# Altium PCB MainBoard.PcbDoc (part 2 of 2)
Units mm, origin at the board's own origin, x right, y up, seen from the top; angles counter-clockwise.
Board outline 160 x 182.5 mm, 4 copper layers (Component Side, Ground Plane, Power Plane, Solder Side), stack 0.844 mm thick; 72 components, 164 nets, 724 pads, 131 vias.
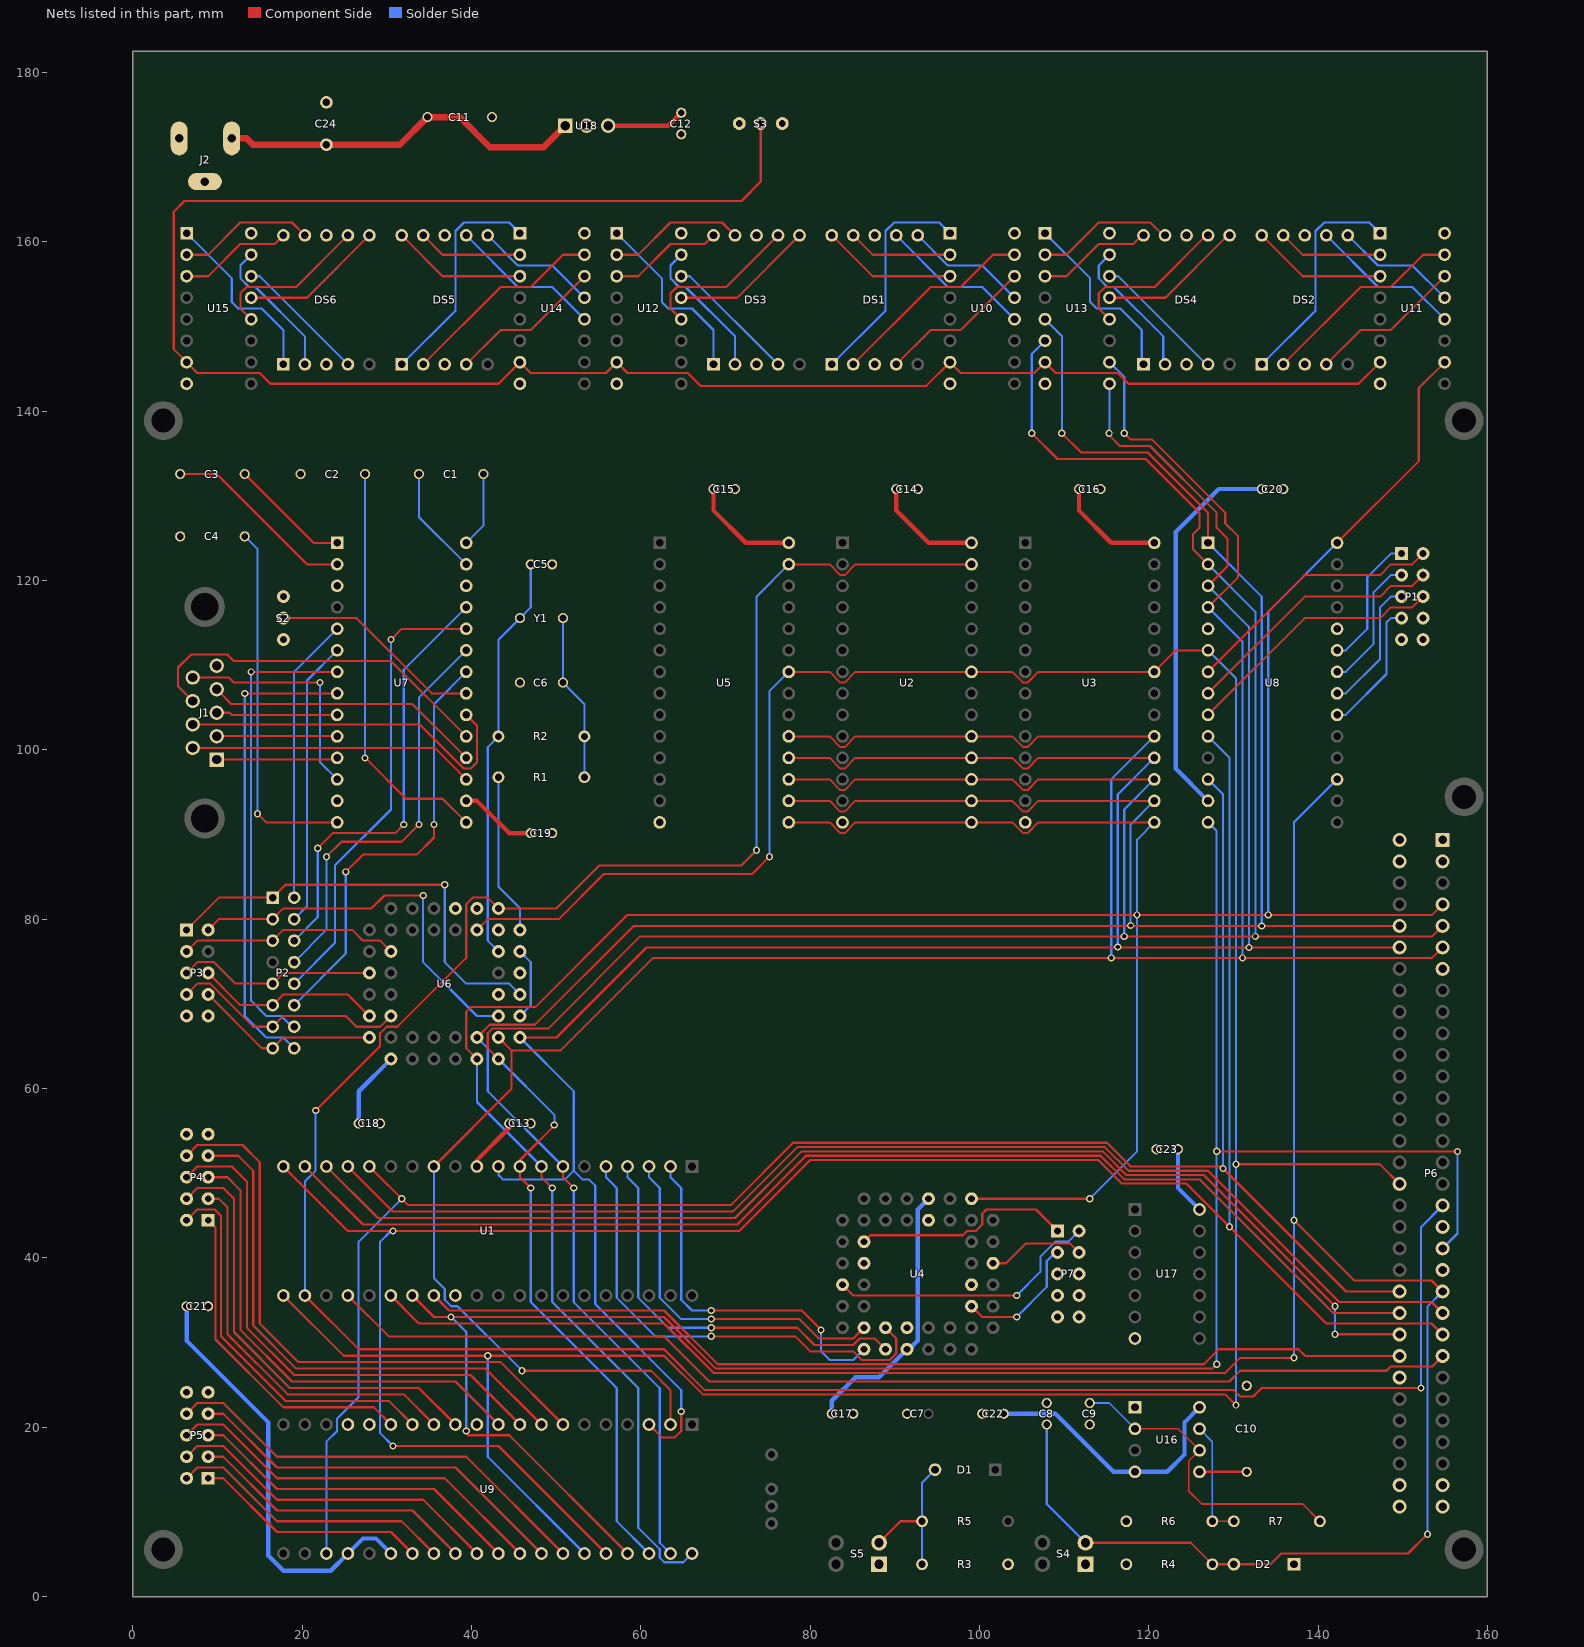
[diagram p4: the nets of this part, all layers, seen from the top]

## Via types
v1: diameter 0.85, hole 0.5, Component Side to Solder Side, 131 vias

## Nets (pads, with @x,y where several pads share a name; then routed paths per layer and width w, separated by ;. In a path a pad name is that pad's centre, name@x,y a point inside that pad or via, vN(x,y) a via of type N, cw(c..) or ccw(c..) an arc to the next point about the centre after c; other vN are vias at no path point) (continued)
D3: P6.A4 U1.8 U2.15 U3.15 U4.40 U5.15 U6.4 U8.28 U9.40 U11.10 | length 379.8
  Component Side w0.254: U6.4@40.64,63.5 39.37,64.77 39.37,69.088 39.901,69.619 47.521,69.619 58.42,80.518 v1(118.618,80.518) 153.468,80.518 P6.A4@154.7,81.75 ; U1.8@48.26,50.8 48.26,49.53 v1(49.53,48.26) ; U5.15@77.47,91.44 82.296,91.44 83.566,90.17 84.074,90.17 85.344,91.44 U2.15@99.06,91.44 103.886,91.44 105.156,90.17 105.664,90.17 106.934,91.44 U3.15@120.65,91.44 ; U4.40@99.06,46.99 v1(113.03,46.99) ; U8.28@142.24,124.46 151.892,134.112 151.892,142.748 U11.10@154.94,145.796
  Solder Side w0.254: U6.4@40.64,63.5 40.64,58.42 U1.8@48.26,50.8 ; v1(49.53,48.26) 49.53,34.798 59.69,24.638 59.69,8.128 62.23,5.588 62.23,4.572 62.749,4.053 65.013,4.053 U9.40@66.04,5.08 ; v1(113.03,46.99) 118.618,52.578 v1(118.618,80.518) 118.618,89.408 U3.15@120.65,91.44 ; v1(134.112,80.518) 134.112,116.332 U8.28@142.24,124.46
D4: P6.C5 U1.7 U2.16 U3.16 U5.16 U6.5 U8.1 U9.39 U13.5 | length 332.9
  Component Side w0.254: U6.5@40.64,66.04 42.141,67.541 47.475,67.541 59.144,79.21 P6.C5@149.62,79.21 ; U1.7@50.8,50.8 50.8,49.53 v1(52.07,48.26) ; U5.16@77.47,93.98 82.296,93.98 83.566,92.71 84.074,92.71 85.344,93.98 U2.16@99.06,93.98 103.886,93.98 105.156,92.71 105.664,92.71 106.934,93.98 U3.16@120.65,93.98 ; v1(109.728,137.414) 112.014,135.128 119.888,135.128 127,128.016 U8.1@127,124.46
  Solder Side w0.254: U6.5@40.64,66.04 41.91,64.77 41.91,59.69 U1.7@50.8,50.8 ; v1(52.07,48.26) 52.07,34.776 62.23,24.616 62.23,6.35 U9.39@63.5,5.08 ; U13.5@107.741,150.876 109.728,148.889 v1(109.728,137.414) ; v1(117.856,79.248) 117.856,91.186 U3.16@120.65,93.98 ; U8.1@127,124.46 133.35,118.11 v1@133.35,79.248
  other v1: 133.35,79.21
D5: P6.A5 U1.9 U2.17 U3.17 U5.17 U6.6 U8.2 U9.38 U13.6 | length 344.7
  Component Side w0.254: U6.6@43.18,63.5 41.91,64.77 41.91,66.548 42.441,67.079 49.045,67.079 59.944,77.978 v1(117.094,77.978) 153.468,77.978 P6.A5@154.7,79.21 ; v1(46.99,48.26) 45.72,49.53 U1.9@45.72,50.8 45.72,51.562 49.784,55.626 v1(49.784,55.689) ; U5.17@77.47,96.52 82.296,96.52 83.566,95.25 84.074,95.25 85.344,96.52 U2.17@99.06,96.52 103.886,96.52 105.156,95.25 105.664,95.25 106.934,96.52 U3.17@120.65,96.52 ; v1(106.172,137.414) 109.22,134.366 119.634,134.366 125.984,128.016 125.984,126.238 125.222,125.476 125.222,123.698 U8.2@127,121.92
  Solder Side w0.254: U6.6@43.18,63.5 49.784,56.896 v1(49.784,55.689) ; v1(46.99,48.26) 46.99,34.798 57.15,24.638 57.15,8.89 U9.38@60.96,5.08 ; v1(106.172,137.414) 106.172,146.767 U13.6@107.741,148.336 ; v1(117.094,77.978) 117.094,92.964 U3.17@120.65,96.52 ; U8.2@127,121.92 132.588,116.332 v1(132.588,77.978)
D6: P6.C6 U1.10 U2.18 U3.18 U5.18 U6.7 U8.3 U9.3 U13.9 | length 325.6
  Component Side w0.254: U6.7@45.72,66.04 50.038,66.04 60.668,76.67 P6.C6@149.62,76.67 ; U9.3@60.96,20.32 62.484,18.796 64.008,18.796 64.77,19.558 v1(64.77,21.844) ; U5.18@77.47,99.06 82.296,99.06 83.566,97.79 84.074,97.79 85.344,99.06 U2.18@99.06,99.06 103.886,99.06 105.156,97.79 105.664,97.79 106.934,99.06 U3.18@120.65,99.06 ; v1(115.316,137.414) 115.316,137.16 116.586,135.89 120.142,135.89 128.016,128.016 128.016,126.238 129.286,124.968 129.286,121.666 U8.3@127,119.38
  Solder Side w0.254: U1.10@43.18,50.8 43.18,49.784 43.688,49.276 51.054,49.276 52.07,50.292 ; U6.7@45.72,66.04 52.07,59.69 52.07,50.292 ; v1(64.77,21.844) 64.77,24.384 54.61,34.544 54.61,48.514 53.848,49.276 53.086,49.276 52.07,50.292 ; v1(115.316,137.414) 115.316,137.249 115.361,137.205 U13.9@115.361,143.256 ; v1(116.332,76.708) 116.332,94.742 U3.18@120.65,99.06 ; U8.3@127,119.38 131.826,114.554 v1@131.826,76.708
  other v1: 131.826,76.67
D7: P6.A6 U1.13 U2.19 U3.19 U5.19 U6.8 U8.4 U9.2 U13.10 | length 341
  Component Side w0.254: U1.13@35.56,50.8 44.704,59.944 44.704,64.516 ; U6.8@43.18,66.04 44.704,64.516 ; v1(45.974,26.67) 61.214,26.67 63.5,24.384 U9.2@63.5,20.32 ; U5.19@77.47,101.6 82.296,101.6 83.566,100.33 84.074,100.33 85.344,101.6 U2.19@99.06,101.6 103.886,101.6 105.156,100.33 105.664,100.33 106.934,101.6 U3.19@120.65,101.6 ; v1(117.094,137.414) 117.856,136.652 120.396,136.652 129.032,128.016 129.032,126.746 130.556,125.222 130.556,120.396 U8.4@127,116.84 ; P6.A6@154.7,76.67 153.468,75.438 v1(115.57,75.438) 61.468,75.438 50.546,64.516 44.704,64.516
  Solder Side w0.254: U1.13@35.56,50.8 35.56,37.592 36.83,36.322 36.83,35.052 37.592,34.29 38.354,34.29 v1(45.974,26.67) ; U13.10@115.361,145.796 117.094,144.063 v1(117.094,137.414) ; v1(115.57,75.438) 115.57,96.52 U3.19@120.65,101.6 ; U8.4@127,116.84 131.064,112.776 v1(131.064,75.438)
D\C\D\: P2.13 P3.7 U6.38 | length 28.3
  Component Side w0.254: P3.7@6.35,71.12 7.62,72.39 9.144,72.39 14.224,67.31 P2.13@16.51,67.31 17.78,68.58 25.146,68.58 26.416,67.31 29.21,67.31 U6.38@30.48,68.58
D\S\R\: P2.11 P3.6 U6.37 | length 22.2
  Component Side w0.254: P3.6@8.89,73.66 12.7,69.85 P2.11@16.51,69.85 17.78,71.12 25.4,71.12 U6.37@27.94,68.58
D\T\R\: P2.9 P3.5 U6.33 | length 23.7
  Component Side w0.254: P3.5@6.35,73.66 7.62,74.93 9.589,74.93 12.129,72.39 P2.9@16.51,72.39 17.78,73.66 U6.33@27.94,73.66
DB9-1: J1.1 U7.11 | length 14.3
  Component Side w0.254: J1.1@9.904,98.854 23.924,98.854 U7.11@24.13,99.06
DB9-2: J1.2 U7.10 | length 14.2
  Component Side w0.254: J1.2@9.904,101.624 24.106,101.624 U7.10@24.13,101.6
DB9-3: J1.3 U7.9 | length 14.3
  Component Side w0.254: J1.3@9.904,104.394 11.43,104.394 11.684,104.14 U7.9@24.13,104.14
DB9-4: J1.4 U7.18 | length 32.8
  Component Side w0.254: J1.4@9.904,107.164 11.658,105.41 33.02,105.41 U7.18@39.37,99.06
DB9-5: C4.2 C5.2 C6.2 C7.1 C8.1 C9.1 C10.1 C11.1 C12.1 C13.1 C14.1 C15.1 C16.1 C17.1 C18.1 C19.1 C20.1 C21.1 C22.1 C23.1 C24.2 DS1.3 DS1.8 DS2.3 DS2.8 DS3.3 DS3.8 DS4.3 DS4.8 DS5.3 DS5.8 DS6.3 DS6.8 J1.5 J2.2 P1.8 P1.10 P3.9 P4.10 P5.10 P6.A1 P6.A7 P6.A19 P6.A21 P6.A32 P6.C1 P6.C26 P6.C32 P7.5 P7.6 P7.7 P7.8 P7.10 S2.1 S3.1 S4.1 S5.1 U1.29 U2.14 U3.14 U4.1 U4.12 U4.23 U4.34 U5.14 U6.12 U6.13 U6.19 U6.20 U6.22 U7.3 U7.13 U7.26 U8.5 U9.11 U9.16 U9.17 U10.8 U11.8 U12.8 U13.8 U14.8 U15.8 U16.1 U17.7 U18.3
DB9-6: J1.6 U7.17 | length 33.8
  Component Side w0.254: J1.6@7.064,100.239 35.651,100.239 U7.17@39.37,96.52
DB9-7: J1.7 U7.20 | length 42.2
  Component Side w0.254: J1.7@7.064,103.009 33.897,103.009 39.116,97.79 39.878,97.79 40.64,98.552 40.64,102.87 U7.20@39.37,104.14
DB9-8: J1.8 U7.19 | length 43.3
  Component Side w0.254: J1.8@7.064,105.779 5.334,107.509 5.334,109.728 6.858,111.252 11.176,111.252 11.938,110.49 30.48,110.49 U7.19@39.37,101.6
DB9-9: J1.9 U7.12 | length 27.6
  Component Side w0.254: J1.9@7.064,108.549 11.339,108.549 11.938,107.95 v1(22.098,107.95)
  Solder Side w0.254: v1(22.098,107.95) 22.098,98.552 U7.12@24.13,96.52
H\A\L\T\: P6.C24 U1.18 | length 143.4
  Component Side w0.254: U1.18@22.86,50.8 28.956,44.704 71.12,44.704 78.994,52.578 114.554,52.578 117.348,49.784 126.492,49.784 v1(141.986,34.29) ; v1(141.986,30.988) 149.582,30.988 P6.C24@149.62,30.95
  Solder Side w0.254: v1(141.986,30.988) v1(141.986,34.29)
I\N\T\: P6.C22 U1.16 U8.12 U9.23 | length 226.2
  Component Side w0.254: U1.16@27.94,50.8 32.512,46.228 70.612,46.228 77.978,53.594 115.062,53.594 117.856,50.8 128.524,50.8 143.294,36.03 P6.C22@149.62,36.03
  Solder Side w0.254: U9.23@22.86,5.08 22.86,18.288 24.13,19.558 24.13,21.021 26.67,23.561 26.67,41.91 v1(31.75,46.99) ; U8.12@127,96.52 128.778,94.742 v1(128.778,50.546)
I\O\R\Q\: P6.A24 U1.20 U8.10 U9.36 | length 268.3
  Component Side w0.254: U1.20@17.78,50.8 25.4,43.18 v1(30.734,43.18) 71.628,43.18 80.01,51.562 114.046,51.562 116.84,48.768 124.46,48.768 140.97,32.258 153.392,32.258 P6.A24@154.7,30.95 ; v1(30.734,17.78) 43.18,17.78 U9.36@55.88,5.08
  Solder Side w0.254: v1(30.734,17.78) 29.21,19.304 29.21,41.91 30.48,43.18 v1(30.734,43.18) ; U8.10@127,101.6 129.54,99.06 v1(129.54,43.688)
LE: S3.2 U10.7 U11.7 U12.7 U13.7 U14.7 U15.7 | length 245.7
  Component Side w0.254: S3.2@74.168,173.99 74.168,167.132 71.882,164.846 6.096,164.846 4.826,163.576 4.826,147.32 U15.7@6.35,145.796 7.62,144.526 14.986,144.526 16.256,143.256 43.18,143.256 U14.7@45.72,145.796 46.99,144.526 55.88,144.526 U12.7@57.15,145.796 58.42,144.526 65.532,144.526 67.056,143.002 93.726,143.002 U10.7@96.52,145.796 97.79,144.526 106.471,144.526 U13.7@107.741,145.796 109.011,144.526 116.332,144.526 117.602,143.256 144.78,143.256 U11.7@147.32,145.796
M\1\: P6.A20 U1.27 U8.14 U9.37 | length 243.3
  Component Side w0.254: U1.27@33.02,35.56 35.56,33.02 62.738,33.02 68.834,26.924 127.508,26.924 v1(128.016,27.432) ; v1(39.37,19.558) 39.37,19.304 39.624,19.05 44.45,19.05 U9.37@58.42,5.08 ; v1(128.016,52.584) 128.078,52.646 128.146,52.578 v1(156.464,52.578)
  Solder Side w0.254: v1(37.592,33.02) 39.37,31.242 v1(39.37,19.558) ; U8.14@127,91.44 128.016,90.424 v1(128.016,52.584) v1(128.016,27.432) ; P6.A20@154.7,41.11 156.464,42.874 v1(156.464,52.578)
M\R\E\Q\: P6.C23 U1.19 | length 143.2
  Component Side w0.254: U1.19@20.32,50.8 27.178,43.942 71.374,43.942 79.502,52.07 114.3,52.07 117.094,49.276 125.984,49.276 141.77,33.49 P6.C23@149.62,33.49
MMU_A12: U1.2 U4.18 | length 42.8
  Component Side w0.254: v1(68.326,33.782) 78.994,33.782 v1(81.28,31.496)
  Solder Side w0.254: U1.2@63.5,50.8 63.5,49.53 64.77,48.26 64.77,35.052 66.04,33.782 v1(68.326,33.782) ; v1(81.28,31.496) 81.28,28.956 82.296,27.94 85.09,27.94 U4.18@86.36,29.21
MMU_A13: U1.3 U4.19 | length 42.7
  Component Side w0.254: v1(68.326,32.766) 78.74,32.766 81.026,30.48 85.09,30.48 U4.19@86.36,31.75
  Solder Side w0.254: U1.3@60.96,50.8 60.96,49.53 62.23,48.26 62.23,35.306 64.77,32.766 v1(68.326,32.766)
MMU_A14: U1.4 U4.20 | length 48.4
  Component Side w0.254: v1(68.326,31.75) 78.486,31.75 80.518,29.718 85.09,29.718 85.852,30.48 87.63,30.48 U4.20@88.9,29.21
  Solder Side w0.254: U1.4@58.42,50.8 58.42,49.53 59.69,48.26 59.69,35.306 63.246,31.75 v1(68.326,31.75)
MMU_A15: U1.5 U4.21 | length 56
  Component Side w0.254: v1(68.326,30.734) 78.232,30.734 80.01,28.956 85.09,28.956 86.106,27.94 89.408,27.94 90.17,28.702 90.17,30.48 U4.21@88.9,31.75
  Solder Side w0.254: U1.5@55.88,50.8 55.88,49.53 57.15,48.26 57.15,35.306 61.722,30.734 v1(68.326,30.734)
NetC1_1: C1.1 U7.28 | length 9
  Solder Side w0.254: U7.28@39.37,124.46 41.402,126.492 C1.1@41.402,132.588
NetC1_2: C1.2 U7.27 | length 13
  Solder Side w0.254: C1.2@33.782,132.588 33.782,127.508 U7.27@39.37,121.92
NetC2_1: C2.1 U7.15 | length 48.6
  Component Side w0.254: v1(27.432,99.06) 32.258,94.234 36.576,94.234 U7.15@39.37,91.44
  Solder Side w0.254: v1(27.432,99.06) C2.1@27.432,132.588
NetC3_1: C3.1 U7.2 | length 23
  Component Side w0.254: C3.1@5.588,132.588 9.906,132.588 20.574,121.92 U7.2@24.13,121.92
NetC3_2: C3.2 U7.1 | length 14.3
  Component Side w0.254: C3.2@13.208,132.588 21.336,124.46 U7.1@24.13,124.46
NetC4_1: C4.1 U7.14 | length 43.2
  Component Side w0.254: v1(14.732,92.456) 15.748,91.44 U7.14@24.13,91.44
  Solder Side w0.254: C4.1@13.208,125.222 14.732,123.698 v1(14.732,92.456)
NetC5_1: C5.1 R2.2 U6.16 Y1.1 | length 48.4
  Solder Side w0.254: U6.16@43.18,76.2 41.91,77.47 41.91,100.33 R2.2@43.18,101.6 43.18,113.03 Y1.1@45.72,115.57 46.99,116.84 C5.1@46.99,121.92
NetC6_1: C6.1 R1.1 R2.1 Y1.2 | length 19.8
  Solder Side w0.254: Y1.2@50.8,115.57 C6.1@50.8,107.95 53.34,105.41 R2.1@53.34,101.6 R1.1@53.34,96.774
NetC9_2: C9.2 R7.1 U16.2 U16.6 | length 37.6
  Component Side w0.2: U16.2@118.364,19.812 123.444,19.812 U16.6@125.984,17.272 124.714,16.002 124.714,12.446 126.238,10.922 138.176,10.922 R7.1@140.208,8.89
  Solder Side w0.2: C9.2@113.03,22.86 115.316,22.86 U16.2@118.364,19.812
NetC10_2: C10.2 U16.5 | length 5.6
  Component Side w0.254: U16.5@125.984,14.732 C10.2@131.572,14.732
NetC11_2: C11.2 C24.1 J2.1 U18.1 | length 43.6
  Component Side w0.762: J2.1@11.668,172.232 13.442,172.232 14.184,171.49 C24.1@22.86,171.49 31.536,171.49 C11.2@34.798,174.752 38.608,174.752 42.164,171.196 48.514,171.196 U18.1@51.054,173.736
NetD1_1: D1.1 R3.1 R5.1 S5.2 | length 17.9
  Component Side w0.254: S5.2@88.138,6.35 90.678,8.89 R5.1@93.218,8.89
  Solder Side w0.254: R3.1@93.218,3.81 R5.1@93.218,8.89 93.218,13.456 D1.1@94.748,14.986
NetDS1_1: DS1.1 U10.1 | length 26.9
  Solder Side w0.254: DS1.1@82.55,145.542 88.9,151.892 88.9,161.29 89.916,162.306 95.25,162.306 U10.1@96.52,161.036
NetDS1_2: DS1.2 U10.15 | length 24.4
  Component Side w0.254: DS1.2@85.09,145.542 94.234,154.686 97.79,154.686 101.6,158.496 U10.15@104.14,158.496
NetDS1_4: DS1.4 U10.14 | length 18.3
  Component Side w0.254: DS1.4@90.17,145.542 94.234,149.606 97.79,149.606 U10.14@104.14,155.956
NetDS1_6: DS1.6 U10.13 | length 14.5
  Solder Side w0.254: DS1.6@92.71,160.782 96.266,157.226 100.33,157.226 U10.13@104.14,153.416
NetDS1_7: DS1.7 U10.12 | length 18.1
  Solder Side w0.254: DS1.7@90.17,160.782 96.266,154.686 100.33,154.686 U10.12@104.14,150.876
NetDS1_9: DS1.9 U10.2 | length 12.4
  Component Side w0.254: DS1.9@85.09,160.782 87.376,158.496 U10.2@96.52,158.496
NetDS1_10: DS1.10 U10.3 | length 16
  Component Side w0.254: DS1.10@82.55,160.782 87.376,155.956 U10.3@96.52,155.956
NetDS2_1: DS2.1 U11.1 | length 26.9
  Solder Side w0.254: DS2.1@133.35,145.542 139.7,151.892 139.7,161.29 140.716,162.306 146.05,162.306 U11.1@147.32,161.036
NetDS2_2: DS2.2 U11.15 | length 24.4
  Component Side w0.254: DS2.2@135.89,145.542 145.034,154.686 148.59,154.686 152.4,158.496 U11.15@154.94,158.496
NetDS2_4: DS2.4 U11.14 | length 18.3
  Component Side w0.254: DS2.4@140.97,145.542 145.034,149.606 148.59,149.606 U11.14@154.94,155.956
NetDS2_6: DS2.6 U11.13 | length 14.5
  Solder Side w0.254: DS2.6@143.51,160.782 147.066,157.226 151.13,157.226 U11.13@154.94,153.416
NetDS2_7: DS2.7 U11.12 | length 18.1
  Solder Side w0.254: DS2.7@140.97,160.782 147.066,154.686 151.13,154.686 U11.12@154.94,150.876
NetDS2_9: DS2.9 U11.2 | length 12.4
  Component Side w0.254: DS2.9@135.89,160.782 138.176,158.496 U11.2@147.32,158.496
NetDS2_10: DS2.10 U11.3 | length 16
  Component Side w0.254: DS2.10@133.35,160.782 138.176,155.956 U11.3@147.32,155.956
NetDS3_1: DS3.1 U12.1 | length 21.9
  Solder Side w0.254: U12.1@57.15,161.036 62.484,155.702 62.484,152.908 63.246,152.146 66.04,152.146 68.58,149.606 DS3.1@68.58,145.542
NetDS3_2: DS3.2 U12.15 | length 17.1
  Solder Side w0.254: U12.15@64.77,158.496 63.5,157.226 63.5,155.702 64.516,154.686 65.278,154.686 71.12,148.844 DS3.2@71.12,145.542
NetDS3_4: DS3.4 U12.14 | length 15.7
  Solder Side w0.254: U12.14@64.77,155.956 65.786,155.956 DS3.4@76.2,145.542
NetDS3_6: DS3.6 U12.13 | length 17
  Component Side w0.254: U12.13@64.77,153.416 71.374,153.416 DS3.6@78.74,160.782
NetDS3_7: DS3.7 U12.12 | length 19.1
  Component Side w0.254: U12.12@64.77,150.876 63.5,152.146 63.5,153.924 64.262,154.686 70.104,154.686 DS3.7@76.2,160.782
NetDS3_9: DS3.9 U12.2 | length 16.2
  Component Side w0.254: U12.2@57.15,158.496 59.69,158.496 63.5,162.306 69.596,162.306 DS3.9@71.12,160.782
NetDS3_10: DS3.10 U12.3 | length 13.4
  Component Side w0.254: U12.3@57.15,155.956 59.69,155.956 63.5,159.766 67.564,159.766 DS3.10@68.58,160.782
NetDS4_1: DS4.1 U13.1 | length 21.9
  Solder Side w0.254: U13.1@107.741,161.036 113.075,155.702 113.075,152.908 113.837,152.146 116.631,152.146 119.171,149.606 DS4.1@119.171,145.542
NetDS4_2: DS4.2 U13.15 | length 17.1
  Solder Side w0.254: U13.15@115.361,158.496 114.091,157.226 114.091,155.702 115.107,154.686 115.869,154.686 121.711,148.844 DS4.2@121.711,145.542
NetDS4_4: DS4.4 U13.14 | length 15.7
  Solder Side w0.254: U13.14@115.361,155.956 116.377,155.956 DS4.4@126.791,145.542
NetDS4_6: DS4.6 U13.13 | length 17
  Component Side w0.254: U13.13@115.361,153.416 121.965,153.416 DS4.6@129.331,160.782
NetDS4_7: DS4.7 U13.12 | length 19.1
  Component Side w0.254: U13.12@115.361,150.876 114.091,152.146 114.091,153.924 114.853,154.686 120.695,154.686 DS4.7@126.791,160.782
NetDS4_9: DS4.9 U13.2 | length 16.2
  Component Side w0.254: U13.2@107.741,158.496 110.281,158.496 114.091,162.306 120.187,162.306 DS4.9@121.711,160.782
NetDS4_10: DS4.10 U13.3 | length 13.4
  Component Side w0.254: U13.3@107.741,155.956 110.281,155.956 114.091,159.766 118.155,159.766 DS4.10@119.171,160.782
NetDS5_1: DS5.1 U14.1 | length 26.9
  Solder Side w0.254: DS5.1@31.75,145.542 38.1,151.892 38.1,161.29 39.116,162.306 44.45,162.306 U14.1@45.72,161.036
NetDS5_2: DS5.2 U14.15 | length 24.4
  Component Side w0.254: DS5.2@34.29,145.542 43.434,154.686 46.99,154.686 50.8,158.496 U14.15@53.34,158.496
NetDS5_4: DS5.4 U14.14 | length 18.3
  Component Side w0.254: DS5.4@39.37,145.542 43.434,149.606 46.99,149.606 U14.14@53.34,155.956
NetDS5_6: DS5.6 U14.13 | length 14.5
  Solder Side w0.254: DS5.6@41.91,160.782 45.466,157.226 49.53,157.226 U14.13@53.34,153.416
NetDS5_7: DS5.7 U14.12 | length 18.1
  Solder Side w0.254: DS5.7@39.37,160.782 45.466,154.686 49.53,154.686 U14.12@53.34,150.876
NetDS5_9: DS5.9 U14.2 | length 12.4
  Component Side w0.254: DS5.9@34.29,160.782 36.576,158.496 U14.2@45.72,158.496
NetDS5_10: DS5.10 U14.3 | length 16
  Component Side w0.254: DS5.10@31.75,160.782 36.576,155.956 U14.3@45.72,155.956
NetDS6_1: DS6.1 U15.1 | length 21.9
  Solder Side w0.254: U15.1@6.35,161.036 11.684,155.702 11.684,152.908 12.446,152.146 15.24,152.146 17.78,149.606 DS6.1@17.78,145.542
NetDS6_2: DS6.2 U15.15 | length 17.1
  Solder Side w0.254: U15.15@13.97,158.496 12.7,157.226 12.7,155.702 13.716,154.686 14.478,154.686 20.32,148.844 DS6.2@20.32,145.542
NetDS6_4: DS6.4 U15.14 | length 15.7
  Solder Side w0.254: U15.14@13.97,155.956 14.986,155.956 DS6.4@25.4,145.542
NetDS6_6: DS6.6 U15.13 | length 17
  Component Side w0.254: U15.13@13.97,153.416 20.574,153.416 DS6.6@27.94,160.782
NetDS6_7: DS6.7 U15.12 | length 19.1
  Component Side w0.254: U15.12@13.97,150.876 12.7,152.146 12.7,153.924 13.462,154.686 19.304,154.686 DS6.7@25.4,160.782
NetDS6_9: DS6.9 U15.2 | length 16.2
  Component Side w0.254: U15.2@6.35,158.496 8.89,158.496 12.7,162.306 18.796,162.306 DS6.9@20.32,160.782
NetDS6_10: DS6.10 U15.3 | length 13.4
  Component Side w0.254: U15.3@6.35,155.956 8.89,155.956 12.7,159.766 16.764,159.766 DS6.10@17.78,160.782
NetJ2_3: J2.3
NetP1_1: P1.1 U8.23 | length 15.9
  Solder Side w0.254: U8.23@142.24,111.76 143.256,111.76 145.796,114.3 145.796,120.396 148.59,123.19 P1.1@149.86,123.19
NetP1_2: P1.2 U8.7 | length 31.2
  Component Side w0.254: U8.7@127,109.22 138.43,120.65 147.32,120.65 148.59,121.92 151.13,121.92 P1.2@152.4,123.19
NetP1_3: P1.3 U8.22 | length 15.9
  Solder Side w0.254: U8.22@142.24,109.22 143.256,109.22 146.558,112.522 146.558,118.618 148.59,120.65 P1.3@149.86,120.65
NetP1_4: P1.4 U8.8 | length 31.2
  Component Side w0.254: U8.8@127,106.68 138.43,118.11 147.32,118.11 148.59,119.38 151.13,119.38 P1.4@152.4,120.65
NetP1_5: P1.5 U8.21 | length 15.9
  Solder Side w0.254: U8.21@142.24,106.68 143.256,106.68 147.32,110.744 147.32,116.84 148.59,118.11 P1.5@149.86,118.11
NetP1_6: P1.6 U8.9 | length 31.2
  Component Side w0.254: U8.9@127,104.14 138.43,115.57 147.32,115.57 148.59,116.84 151.13,116.84 P1.6@152.4,118.11
NetP1_7: P1.7 U8.20 | length 15.9
  Solder Side w0.254: U8.20@142.24,104.14 143.256,104.14 148.082,108.966 148.082,115.062 148.59,115.57 P1.7@149.86,115.57
NetP2_2: P2.2 U7.5 | length 33.9
  Solder Side w0.254: P2.2@19.05,82.55 19.05,109.22 U7.5@24.13,114.3
NetP2_4: P2.4 U7.6 | length 33.9
  Solder Side w0.254: P2.4@19.05,80.01 20.574,81.534 20.574,108.204 U7.6@24.13,111.76
NetP2_6: P2.6 U7.25 | length 52.1
  Component Side w0.254: v1(21.844,88.392) 23.622,90.17 30.988,90.17 v1(32.004,91.186)
  Solder Side w0.254: P2.6@19.05,77.47 21.844,80.264 v1(21.844,88.392) ; v1(32.004,91.186) 32.004,109.474 U7.25@39.37,116.84
NetP2_8: P2.8 U7.23 | length 49.4
  Component Side w0.254: v1(22.86,87.376) 24.638,89.154 31.75,89.154 v1(33.782,91.186)
  Solder Side w0.254: P2.8@19.05,74.93 22.86,78.74 v1(22.86,87.376) ; v1(33.782,91.186) 33.782,106.172 U7.23@39.37,111.76
NetP2_10: P2.10 U7.24 | length 54.8
  Component Side w0.254: v1(30.48,113.03) 31.75,114.3 U7.24@39.37,114.3
  Solder Side w0.254: P2.10@19.05,72.39 23.876,77.216 23.876,86.36 30.48,92.964 v1(30.48,113.03)
NetP2_12: P2.12 U7.22 | length 51.5
  Component Side w0.254: v1(25.146,85.598) 27.178,87.63 33.528,87.63 35.56,89.662 v1(35.56,91.186)
  Solder Side w0.254: P2.12@19.05,69.85 25.146,75.946 v1(25.146,85.598) ; v1(35.56,91.186) 35.56,105.41 U7.22@39.37,109.22
NetP2_14: P2.14 U7.7 | length 55.4
  Component Side w0.254: v1(13.97,109.22) U7.7@24.13,109.22
  Solder Side w0.254: v1(13.97,109.22) 13.97,70.358 15.748,68.58 17.526,68.58 18.796,67.31 P2.14@19.05,67.31
NetP2_16: P2.16 U7.8 | length 56.4
  Component Side w0.254: v1(13.208,106.68) U7.8@24.13,106.68
  Solder Side w0.254: v1(13.208,106.68) 13.208,68.58 15.748,66.04 17.78,66.04 P2.16@19.05,64.77
NetP4_1: P4.1 U9.15 | length 39.3
  Component Side w0.254: P4.1@8.89,44.45 9.767,43.573 9.767,30.365 17.78,22.352 28.448,22.352 U9.15@30.48,20.32
NetP4_2: P4.2 U9.14 | length 46
  Component Side w0.254: P4.2@6.35,44.45 7.62,45.72 9.652,45.72 10.414,44.958 10.414,30.734 18.034,23.114 30.226,23.114 U9.14@33.02,20.32
NetP4_3: P4.3 U9.13 | length 46.5
  Component Side w0.254: P4.3@8.89,46.99 10.16,46.99 11.176,45.974 11.176,30.988 18.288,23.876 32.004,23.876 U9.13@35.56,20.32
NetP4_4: P4.4 U9.12 | length 53.1
  Component Side w0.254: P4.4@6.35,46.99 7.62,48.26 10.668,48.26 11.938,46.99 11.938,31.242 18.542,24.638 33.782,24.638 U9.12@38.1,20.32
NetP4_5: P4.5 U9.10 | length 56.1
  Component Side w0.254: P4.5@8.89,49.53 11.176,49.53 12.7,48.006 12.7,31.496 18.796,25.4 38.1,25.4 U9.10@43.18,20.32
NetP4_6: P4.6 U9.9 | length 62.6
  Component Side w0.254: P4.6@6.35,49.53 7.62,50.8 11.684,50.8 13.462,49.022 13.462,31.75 19.05,26.162 39.878,26.162 U9.9@45.72,20.32
NetP4_7: P4.7 U9.8 | length 63.2
  Component Side w0.254: P4.7@8.89,52.07 12.446,52.07 14.224,50.292 14.224,32.004 19.304,26.924 41.656,26.924 U9.8@48.26,20.32
NetP4_8: P4.8 U9.7 | length 69.8
  Component Side w0.254: P4.8@6.35,52.07 7.62,53.34 12.954,53.34 14.986,51.308 14.986,32.258 19.558,27.686 43.434,27.686 U9.7@50.8,20.32
NetP5_1: P5.1 U9.27 | length 27.8
  Component Side w0.254: P5.1@8.89,13.97 10.668,13.97 17.018,7.62 30.48,7.62 U9.27@33.02,5.08
NetP5_2: P5.2 U9.28 | length 33.9
  Component Side w0.254: P5.2@6.35,13.97 7.62,15.24 10.668,15.24 17.018,8.89 31.75,8.89 U9.28@35.56,5.08
NetP5_3: P5.3 U9.29 | length 33.9
  Component Side w0.254: P5.3@8.89,16.51 10.668,16.51 17.018,10.16 33.02,10.16 U9.29@38.1,5.08
NetP5_4: P5.4 U9.30 | length 40.1
  Component Side w0.254: P5.4@6.35,16.51 7.62,17.78 10.668,17.78 17.018,11.43 34.29,11.43 U9.30@40.64,5.08
NetP5_5: P5.5 U9.31 | length 40.1
  Component Side w0.254: P5.5@8.89,19.05 10.668,19.05 17.018,12.7 35.56,12.7 U9.31@43.18,5.08
NetP5_6: P5.6 U9.32 | length 46.2
  Component Side w0.254: P5.6@6.35,19.05 7.62,20.32 10.668,20.32 17.018,13.97 36.83,13.97 U9.32@45.72,5.08
NetP5_7: P5.7 U9.33 | length 46.2
  Component Side w0.254: P5.7@8.89,21.59 10.668,21.59 17.018,15.24 38.1,15.24 U9.33@48.26,5.08
NetP5_8: P5.8 U9.34 | length 52.3
  Component Side w0.254: P5.8@6.35,21.59 7.62,22.86 10.668,22.86 17.018,16.51 39.37,16.51 U9.34@50.8,5.08
NetR1_2: R1.2 U6.17 | length 19.1
  Solder Side w0.254: R1.2@43.18,96.774 43.18,83.82 45.72,81.28 U6.17@45.72,78.74
NetR6_1: R6.1 R7.2 U16.7 | length 14.1
  Component Side w0.2: R6.1@127.508,8.89 R7.2@130.048,8.89
  Solder Side w0.2: U16.7@125.984,19.812 127.508,18.288 R6.1@127.508,8.89
NetS2_2: S2.2 U7.21 | length 25.3
  Component Side w0.254: S2.2@17.78,115.57 26.416,115.57 35.306,106.68 U7.21@39.37,106.68
NetU6_9: U6.9 U6.15 | length 8.7
  Solder Side w0.254: U6.9@45.72,68.58 46.99,69.85 46.99,74.93 U6.15@45.72,76.2
NMI: P6.A23 U1.17 | length 142.8
  Component Side w0.254: U1.17@25.4,50.8 30.734,45.466 70.866,45.466 78.486,53.086 114.808,53.086 117.602,50.292 127,50.292 142.494,34.798 153.392,34.798 P6.A23@154.7,33.49
R\D\: P6.C17 U1.21 U2.22 U3.22 U5.22 U6.21 U8.6 U9.35 | length 370.4
  Component Side w0.254: U1.21@17.78,35.56 24.892,28.448 62.738,28.448 67.31,23.876 129.032,23.876 v1(130.302,22.606) ; U6.21@40.64,78.74 41.91,80.01 50.292,80.01 55.626,85.344 73.152,85.344 v1(75.184,87.376) ; U5.22@77.47,109.22 82.296,109.22 83.566,107.95 84.074,107.95 85.344,109.22 U2.22@99.06,109.22 103.886,109.22 105.156,107.95 105.664,107.95 106.934,109.22 U3.22@120.65,109.22 123.19,111.76 U8.6@127,111.76 ; v1(130.302,51.054) 147.296,51.054 P6.C17@149.62,48.73
  Solder Side w0.254: v1(41.91,28.448) 41.91,16.51 U9.35@53.34,5.08 ; v1(75.184,87.376) 75.184,106.934 U5.22@77.47,109.22 ; U8.6@127,111.76 130.302,108.458 v1(130.302,51.054) v1(130.302,22.606)
R\F\S\H\: P6.C25 U1.28 | length 118.5
  Component Side w0.254: U1.28@35.56,35.56 37.338,33.782 62.738,33.782 69.088,27.432 126.492,27.432 128.27,29.21 137.668,29.21 138.468,28.41 P6.C25@149.62,28.41
R\I\: P2.15 P3.8 U6.39 | length 22.2
  Component Side w0.254: P3.8@8.89,71.12 15.24,64.77 P2.15@16.51,64.77 17.78,66.04 U6.39@27.94,66.04
R\S\T\: C8.2 D2.1 P6.A22 R4.1 S4.2 U1.26 U8.17 | length 290.8
  Component Side w0.254: U1.26@30.48,35.56 33.782,32.258 62.738,32.258 68.58,26.416 129.032,26.416 130.81,28.194 v1(137.16,28.194) ; S4.2@112.522,6.35 124.968,6.35 R4.1@127.508,3.81 D2.1@130.054,3.81 134.366,3.81 135.636,5.08 150.622,5.08 v1(152.908,7.366) ; v1(137.16,44.45) 144.272,37.338 153.392,37.338 P6.A22@154.7,36.03
  Solder Side w0.254: C8.2@107.95,20.32 107.95,10.922 S4.2@112.522,6.35 ; v1(137.16,28.194) v1(137.16,44.45) 137.16,91.44 U8.17@142.24,96.52 ; v1(152.908,7.366) 152.908,34.238 P6.A22@154.7,36.03
R\T\S\: P2.5 P3.3 U6.32 | length 26.2
  Component Side w0.254: P3.3@6.35,76.2 7.62,77.47 P2.5@16.51,77.47 17.78,78.74 25.908,78.74 27.178,77.47 29.21,77.47 U6.32@30.48,76.2
RXD: P2.3 P3.2 U6.10 | length 46.5
  Component Side w0.254: P3.2@8.89,78.74 10.16,80.01 P2.3@16.51,80.01 17.78,81.28 28.194,81.28 29.718,82.804 v1(34.29,82.804)
  Solder Side w0.254: v1(34.29,82.804) 34.29,74.93 40.64,68.58 U6.10@43.18,68.58
TCK: P7.2 U4.13 | length 32.7
  Component Side w0.254: U4.13@83.82,36.83 85.09,35.56 v1@104.14,35.56 ; v1@104.371,35.329 104.394,35.352 v1(104.394,35.56)
  Solder Side w0.254: v1(104.394,35.56) 107.188,38.354 107.188,40.132 108.966,41.91 110.49,41.91 P7.2@111.76,43.18
TDI: P7.1 U4.10 | length 26.2
  Component Side w0.254: U4.10@86.36,41.91 87.122,42.672 94.742,42.672 98.044,42.672 98.552,43.18 99.568,43.18 100.33,43.942 100.33,45.212 100.838,45.72 106.68,45.72 P7.1@109.22,43.18
TDO: P7.4 U4.35 | length 11.5
  Component Side w0.254: U4.35@101.6,39.37 103.124,39.37 105.433,41.679 110.721,41.679 P7.4@111.76,40.64
TMS: P7.3 U4.32 | length 15.6
  Component Side w0.254: U4.32@99.06,34.29 100.33,33.02 v1(104.394,33.02)
  Solder Side w0.254: v1(104.394,33.02) 107.95,36.576 107.95,39.624 108.966,40.64 P7.3@109.22,40.64
TXD: P2.1 P3.1 U6.11 | length 52.3
  Component Side w0.254: P3.1@6.35,78.74 10.16,82.55 P2.1@16.51,82.55 18.034,84.074 v1(36.83,84.074)
  Solder Side w0.254: v1(36.83,84.074) 36.83,74.93 39.37,72.39 44.45,72.39 U6.11@45.72,71.12
VCC: C2.2 C12.2 C13.2 C14.2 C15.2 C16.2 C17.2 C18.2 C19.2 C20.2 C21.2 C22.2 C23.2 D2.2 P1.9 P3.10 P4.9 P5.9 P6.A2 P6.A31 P6.C2 P6.C31 P7.9 R3.2 R4.2 R6.2 S2.3 S3.3 U1.DEC11 U2.DEC28 U3.DEC28 U4.DEC22 U4.DEC44 U5.DEC28 U6.DEC40 U7.DEC16 U8.24 U8.DEC13 U9.DEC24 U9.DEC26 U10.16 U11.16 U12.16 U13.16 U14.16 U15.16 U16.8 U16.DEC4 U17.DEC14 U18.DEC2 | length 241.4
  Component Side w0.508: U7.DEC16@39.37,93.98 40.64,93.98 44.45,90.17 C19.2@46.99,90.17 ; U1.DEC11@40.64,50.8 40.64,51.562 44.45,55.372 C13.2@44.45,55.88 ; U18.DEC2@56.134,173.736 63.246,173.736 C12.2@64.77,175.26 ; C15.2@68.58,130.81 68.58,128.27 72.39,124.46 U5.DEC28@77.47,124.46 ; C14.2@90.17,130.81 90.17,128.27 93.98,124.46 U2.DEC28@99.06,124.46 ; C16.2@111.76,130.81 111.76,128.27 115.57,124.46 U3.DEC28@120.65,124.46
  Solder Side w0.254: U4.DEC22@91.44,29.21 U4.DEC22@91.694,29.21
  Solder Side w0.508: C21.2@6.35,34.29 6.35,30.226 16.002,20.574 16.002,4.826 17.78,3.048 23.368,3.048 U9.DEC24@25.4,5.08 27.178,6.858 28.702,6.858 U9.DEC26@30.48,5.08 ; C18.2@26.67,55.88 26.67,59.69 U6.DEC40@30.48,63.5 ; C17.2@82.55,21.59 82.55,23.114 85.344,25.908 88.138,25.908 U4.DEC22@91.44,29.21 ; U4.DEC22@91.694,29.21 92.71,30.226 92.71,45.72 U4.DEC44@93.98,46.99 ; C22.2@102.87,21.59 108.966,21.59 115.824,14.732 U16.DEC4@118.364,14.732 122.174,14.732 124.206,16.764 124.206,20.574 U16.8@125.984,22.352 ; C23.2@123.444,52.832 123.444,48.26 U17.DEC14@125.984,45.72 ; U8.DEC13@127,93.98 123.19,97.79 123.19,125.73 128.27,130.81 C20.2@133.35,130.81
W\A\I\T\: P6.A25 U1.24 | length 134.8
  Component Side w0.254: U1.24@25.4,35.56 30.226,30.734 62.738,30.734 68.072,25.4 129.54,25.4 130.81,26.67 148.082,26.67 148.59,27.178 153.468,27.178 P6.A25@154.7,28.41
W\R\: P6.A18 U1.22 U2.27 U5.27 U6.18 | length 310.6
  Component Side w0.254: U1.22@20.32,35.56 26.67,29.21 62.738,29.21 67.564,24.384 130.048,24.384 130.81,23.622 132.334,23.622 133.35,24.638 v1(152.146,24.638) ; v1(21.59,57.404) 29.21,65.024 29.21,66.548 29.972,67.31 31.242,67.31 39.37,75.438 39.37,81.788 40.132,82.55 41.91,82.55 U6.18@43.18,81.28 50.038,81.28 55.118,86.36 71.882,86.36 v1(73.66,88.138) ; U5.27@77.47,121.92 82.296,121.92 83.566,120.65 84.074,120.65 85.344,121.92 U2.27@99.06,121.92
  Solder Side w0.254: U1.22@20.32,35.56 20.32,49.022 21.59,50.292 v1(21.59,57.404) ; v1(73.66,88.138) 73.66,118.11 U5.27@77.47,121.92 ; v1(152.146,24.638) 152.146,43.636 P6.A18@154.7,46.19
pads on no net: DS1.5 DS2.5 DS3.5 DS4.5 DS5.5 DS6.5 J1.10 J1.11 P6.33 P6.34 P6.A16 P6.A17 P6.A26 P6.A27 P6.A28 P6.A29 P6.A30 P6.C15 P6.C16 P6.C18 P6.C19 P6.C20 P6.C21 P6.C30 S4.3 S4.4 S5.3 S5.4 U2.1 U2.26 U3.27 U4.30 U4.31 U5.1 U5.26 U6.23 U6.24 U6.25 U6.29 U6.30 U6.31 U6.34 U6.35 U6.41 U6.42 U6.43 U6.44 U7.4 U8.11 U9.18 U9.21 U9.22 U10.4 U10.11 U11.4 U11.11 U12.4 U12.11 U13.4 U13.11 U14.4 U14.11 U15.4 U15.11 U17.1 U17.2 U17.3 U17.4 U17.5 U17.6 U17.9 U17.10 U17.11 U17.12 U17.13

## Polygon pours and split planes (outlines as drawn)
VCC on Power Plane (split plane): 159.49,0.51 0.51,0.51 0.51,181.99 159.489,181.99
DB9-5 on Ground Plane (split plane): 159.49,0.51 0.51,0.51 0.51,181.99 159.489,181.99

## Other copper
Component Side:
  text "Component Layer (1) -  (TOP)" at 23.114,166.497 h1.52
Solder Side:
  text "Solder Layer (4) - (BOTTOM)" at 23.114,166.497 h1.52
Ground Plane (plane layer: these items are gaps in the copper):
  text "Ground Layer (2)" at 23.114,166.497 h1.52
Power Plane (plane layer: these items are gaps in the copper):
  text "Power Layer (3)" at 23.114,166.497 h1.52

## Silkscreen, mask and mechanical layers (free items; w line width, h text height)
Top Overlay:
  text "address high" at 15.24,138.43 h5.08
  text "address low" at 66.04,138.43 h5.08
  text "DATA" at 125.476,138.176 h5.08
  text "ROMH" at 71.12,102.87 h5.08 r90
  text "ROML" at 92.71,102.87 h5.08 r90
  text "RAM" at 115.062,102.87 h5.08 r90
  text "CTC" at 136.398,102.87 h5.08 r90
  text "Z80uPC" at 62.738,65.278 h22.86
  text "Naoki Pross 3E - SAM Bellinzona  2017" at 62.738,61.976 h1.52
  text "z80 CPU" at 33.02,41.656 h5.08
  text "CLK" at 81.28,11.43 h5.08
  text "RST" at 105.41,11.43 h5.08
  text "PIO" at 38.862,10.668 h5.08

## Dimensions
0,182.5 to 0,0 on Mechanical 1
0,0 to 160,0 on Mechanical 1
157.24,5.55 to 160,0 on Mechanical 1
157.24,5.55 to 157.24,94.45 on Mechanical 1
157.24,94.45 to 160.02,138.938 on Mechanical 1
157.24,5.55 to 160,-7.754 on Mechanical 1

## Text inside footprints (layer, text, board x,y; h text height)
J1: Top Overlay "6" at 3.959,99.739 h1.5 r90; Top Overlay "9" at 3.959,108.049 h1.5 r90; Top Overlay "5" at 13.359,109.434 h1.5 r90; Top Overlay "1" at 13.359,98.604 h1.5 r90
P1: Top Overlay "10" at 151.511,111.633 h1.52 r270; Top Overlay "1" at 149.098,125.349 h1.52 r270
P2: Top Overlay "2" at 18.542,85.09 h1.27 r270; Top Overlay "1" at 16.002,85.09 h1.27 r270; Top Overlay "15" at 16.002,62.992 h1.27 r270; Top Overlay "16" at 18.542,62.992 h1.27 r270
P3: Top Overlay "10" at 8.001,67.183 h1.52 r270; Top Overlay "1" at 5.588,80.899 h1.52 r270
P4: Top Overlay "10" at 7.239,56.007 h1.52 r90; Top Overlay "1" at 9.652,42.291 h1.52 r90
P5: Top Overlay "10" at 7.239,25.527 h1.52 r90; Top Overlay "1" at 9.652,11.811 h1.52 r90
P6: Mechanical 1 "PCB Edge" at 160.5,96.47 h0.6 r270; Top Overlay "1" at 146.92,89.62 h1.5 r270; Top Overlay "a" at 154.2,91.58 h1.5 r270; Top Overlay "c" at 149.12,91.58 h1.5 r270; Top Overlay "32" at 146.92,11.88 h1.5 r270; Top Overlay "11" at 146.92,64.845 h1.5 r270; Top Overlay "21" at 146.92,39.82 h1.5 r270
P7: Top Overlay "10" at 110.871,31.623 h1.52 r270; Top Overlay "1" at 108.458,45.339 h1.52 r270
U18: Top Overlay "3" at 53.094,170.061 h1.5; Top Overlay "2" at 55.634,170.061 h1.5; Top Overlay "1" at 50.804,170.061 h1.5